# EAGLE board RollerShutterNode (EAGLE 6.5.0)
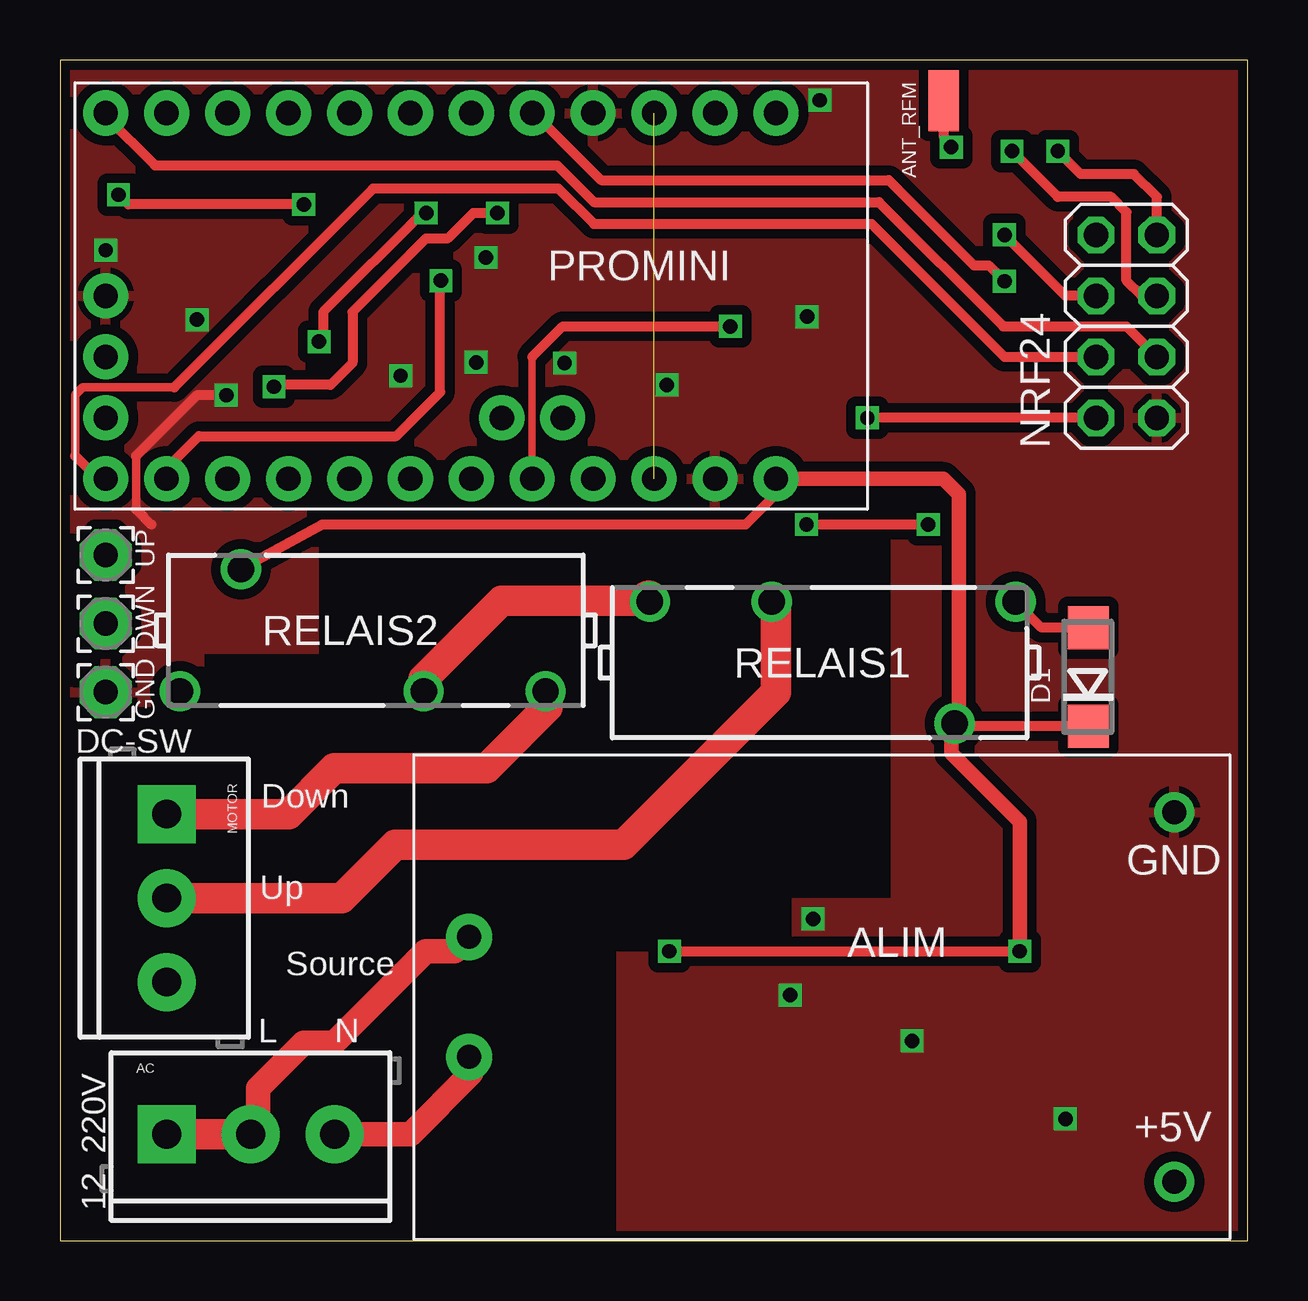
[diagram p0: board, top side]
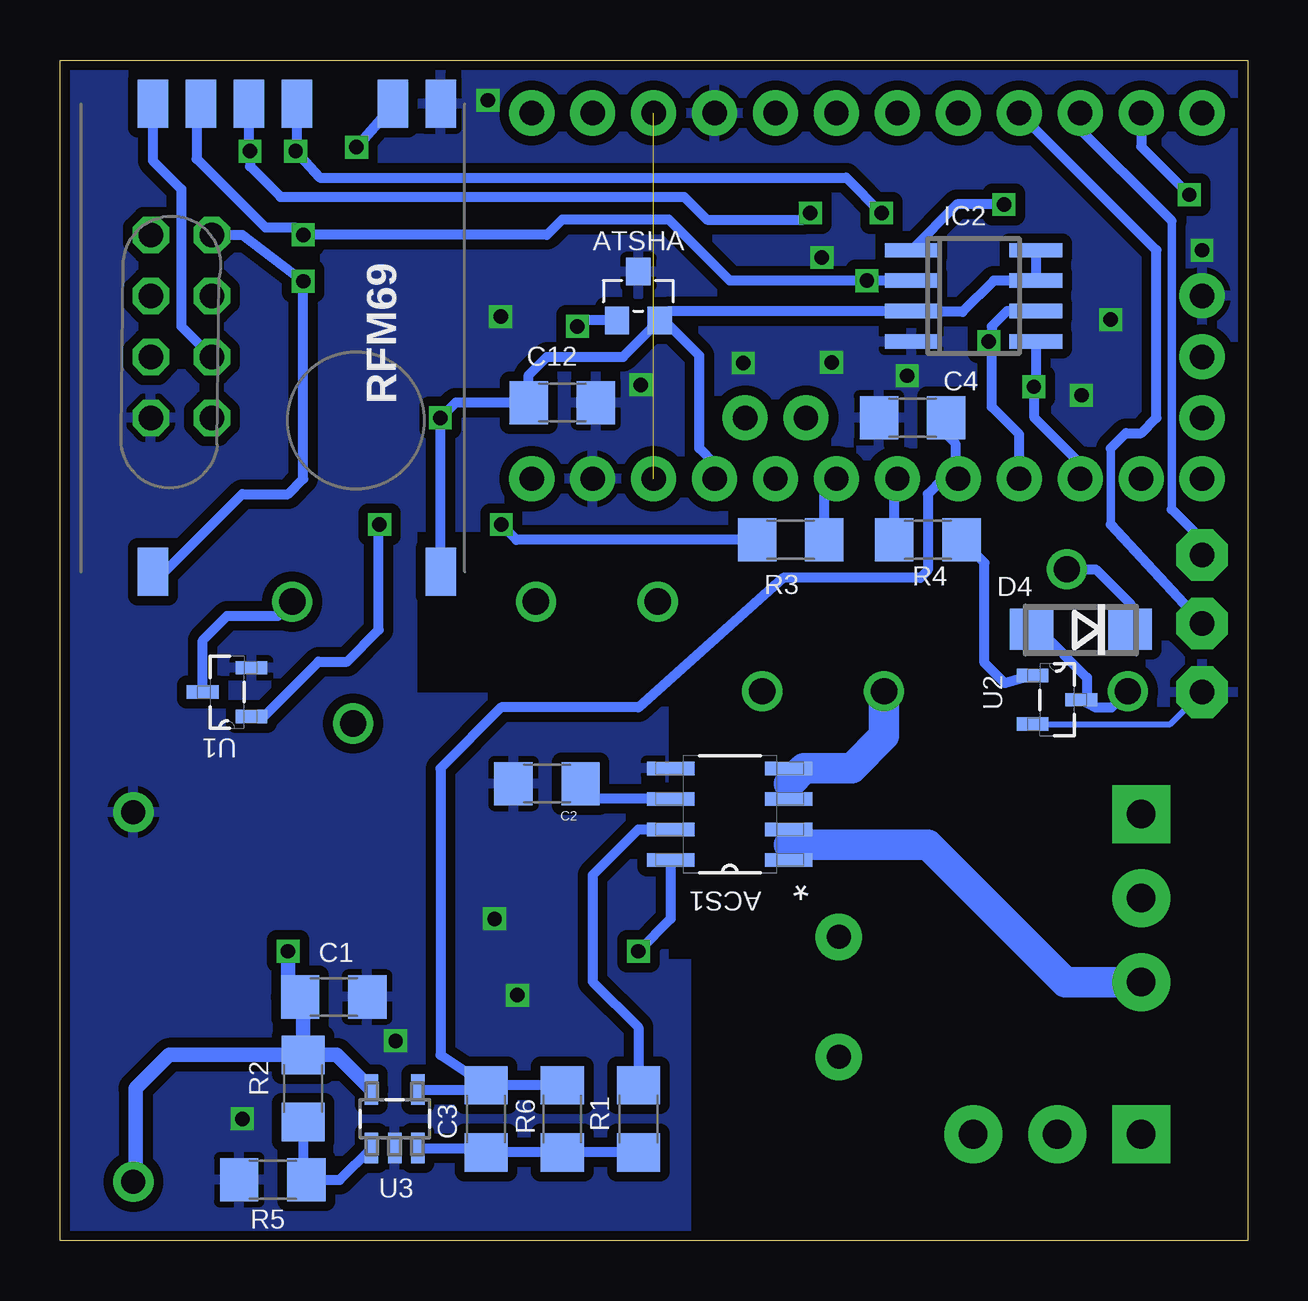
[diagram p1: board, bottom side, seen from below]

Size 49.51 x 49.2 mm. Coordinates in mm from the lower left corner, seen from the top.
Outline: 0,0 49.51,0 49.51,49.2 0,49.2 0,0
Copper layers (1*16): Top 0.0356mm / dielectric 1.5011mm / Bottom 0.0356mm
Design rules "LaenPCBOrder": minimum track width 6mil, minimum drill 13mil, track to track 6mil, track to pad 6mil, pad to pad 6mil, via to via 6mil, smd to smd 6mil, copper to edge 15mil, drill to drill 6mil, minimum pad ring 7mil, minimum via ring 7mil, stop-mask expansion 3mil, vias tented up to drill 0mil, thermal gap 10mil
Net classes: 1 Power: width 0.406 mm

## Footprints (pad centres in the part's own frame; a part is rotated, then mirrored left to right if it is on the bottom)
SCREWTERMINAL-3.5MM-3 = drill 1.2 pad 2.413 square: 1 0,0 | drill 1.2 pad 2.413: 2 3.5,0; 3 7,0
SOIC127P600X175-8N = smd 1.981 x 0.559: 1 -2.464,1.905; 2 -2.464,0.635; 3 -2.464,-0.635; 4 -2.464,-1.905; 5 2.464,-1.905; 6 2.464,-0.635; 7 2.464,0.635; 8 2.464,1.905
HILINK_HLK-PM01 = drill 1 pad 1.93: AC1 2.5,14.7; AC2 -2.5,14.7 | drill 1 pad 1.676: V+ -7.7,-14.7; V- 7.7,-14.7
SMD1,27-2,54 = smd 1.27 x 2.54: 1 0,0
SOT23 = smd 1.016 x 1.143: 1 -0.889,-1.016; 2 0.889,-1.016; 3 0,1.016
1206 = smd 1.6 x 1.8: 1 -1.4,0; 2 1.4,0
DO214AC = smd 1.8 x 1.7: A 2.05,0; C -2.05,0
2,15/1,0 = drill 1.016 pad 2.159 octagon: 1 0,0
SO-08 = smd 0.6 x 2.2: 1 -1.905,-2.6; 2 -0.635,-2.6; 3 0.635,-2.6; 4 1.905,-2.6; 5 1.905,2.6; 6 0.635,2.6; 7 -0.635,2.6; 8 -1.905,2.6
2X04 = drill 1.016 octagon: 1 -3.81,-1.27; 2 -3.81,1.27; 3 -1.27,-1.27; 4 -1.27,1.27; 5 1.27,-1.27; 6 1.27,1.27; 7 3.81,-1.27; 8 3.81,1.27
ARDUINO_PROMINI2 = drill 1.016 pad 1.88: 2 -7.62,2.54; 3 -7.62,0; 4 -7.62,-2.54; 5 -7.62,-5.08; 6 -7.62,-7.62; 7 -7.62,-10.16; 8 -7.62,-12.7; 9 -7.62,-15.24; 10 7.62,-15.24; 11 7.62,-12.7; 12 7.62,-10.16; 13 7.62,-7.62; A0 7.62,-5.08; A1 7.62,-2.54; A2 7.62,0; A3 7.62,2.54; A4 5.08,1.27; A5 5.08,3.81; A6 2.54,-15.24; A7 5.08,-15.24; GND3 -7.62,5.08; GND4 7.62,10.16; GND5 0,-15.24; RAW 7.62,12.7; RST1 -7.62,7.62; RST2 7.62,7.62; RX2 -7.62,10.16; TX2 -7.62,12.7; VCC2 7.62,5.08
G6D = drill 1.1 pad 1.676: 1 8.08,2.5; 5 -2.08,2.5; 7 -7.16,2.5; 13 5.54,-2.58
RFM69W-MINPADS = smd 2 x 1.27: ANA 8,-5; DIO0 -11.5,5; GND 8,-7; MISO 8,1; MOSI 8,3; NSS 8,5; SCK 8,-1; VDD -11.5,-7
SOT103P240X110-3N = smd 1.321 x 0.559: 1 -1.016,1.016; 2 -1.016,-1.016; 3 1.016,0
SOT95P285X120-5N = smd 1.27 x 0.559: 1 -1.219,0.965; 2 -1.219,0; 3 -1.219,-0.965; 4 1.219,-0.965; 5 1.219,0.965

## Placement (x,y rotation side)
AC  [SCREWTERMINAL-3.5MM-3]  4.45,4.45 0 top
ACS1  ACS712_5A  [SOIC127P600X175-8N]  21.59,17.78 180 bottom
ALIM  HILINK_HLK-PM01  [HILINK_HLK-PM01]  31.75,10.16 90 top
ANT_RFM  [SMD1,27-2,54]  36.83,47.51 0 top
ATSHA  ATSHA204A  [SOT23]  25.4,39.37 0 bottom
C1  0.1uf  [1206]  38.1,10.16 0 bottom
C2  0.01uf  [1206]  29.21,19.05 180 bottom
C3  1000pf  [1206]  31.75,5.08 270 bottom
C4  [1206]  13.97,34.29 0 bottom
C12  4u7  [1206]  28.57,34.92 180 bottom
D1  S1G 400v 1a 9843850  [DO214AC]  42.86,23.5 90 top
D4  S1G 400v 1a 9843850  [DO214AC]  6.96,25.48 180 bottom
DWN  [2,15/1,0]  1.91,25.72 0 top
GND  [2,15/1,0]  1.91,22.86 0 top
IC2  AT25DF512C-SSHN-B  [SO-08]  11.43,39.37 270 bottom
MOTOR  [SCREWTERMINAL-3.5MM-3]  4.45,17.78 270 top
NRF24  [2X04]  44.45,38.1 90 top
PROMINI  ARDUINO_PROMINI2  [ARDUINO_PROMINI2]  17.14,39.37 270 top
R1  1k  [1206]  25.4,5.08 270 bottom
R2  100k  [1206]  39.37,6.35 90 bottom
R3  4k7  [1206]  19.05,29.21 180 bottom
R4  4k7  [1206]  13.34,29.21 0 bottom
R5  100k  [1206]  40.64,2.54 0 bottom
R6  3.3k  [1206]  28.57,5.08 90 bottom
RELAIS1  Relais G6D  [G6D]  31.75,24.13 0 top
RELAIS2  Relais G6D  [G6D]  13.08,25.4 180 top
RFM69  RFM69  [RFM69W-MINPADS]  40.64,39.37 90 bottom
U1  MMBT2222A-7-F  [SOT103P240X110-3N]  42.55,22.86 180 bottom
U2  MMBT2222A-7-F  [SOT103P240X110-3N]  7.95,22.54 0 bottom
U3  LM321  [SOT95P285X120-5N]  35.56,5.08 90 bottom
UP  [2,15/1,0]  1.91,28.57 0 top

## Library data of the parts
AC MOTOR = SparkFun-Connectors
ACS1 = pmo_lib; MPN: ACS712ELCTR-20A-T; OC_FARNELL: 1329624; OC_NEWARK: 31M3133; PACKAGE: SOIC-8; SUPPLIER: Allegro
ALIM PROMINI = pmo_lib
ANT_RFM DWN GND UP = wirepad
ATSHA = Sensor_tbowmo
C1-C4 = SparkFun-Passives
C12 = SparkFun-Capacitors
D1 D4 = diode
IC2 = microchip; MF: MICROCHIP; MPN: 25AA080/SN; OC_FARNELL: 1816072; OC_NEWARK: 92C7351
NRF24 = pinhead
R1-R6 = SparkFun-Resistors
RELAIS1 RELAIS2 = relay
RFM69 = LowPowerLab
U1 U2 = pmo_lib; MPN: MMBT2222A-7-F; OC_FARNELL: 1773626; OC_NEWARK: 51R6809; PACKAGE: SOT-23-3; SUPPLIER: DIODES INC.
U3 = pmo_lib; MPN: LM321MF; OC_FARNELL: 9779116; OC_NEWARK: 37K8530; PACKAGE: SOT-23-5; SUPPLIER: National Semiconductors

## Nets
12_220: ACS1.1 ACS1.2 MOTOR.3
A0: C3.1 C4.2 PROMINI.A0 R6.2 U3.4
A3: ATSHA.1 PROMINI.A3
BT_DOWN: DWN.1 PROMINI.6
BT_UP: PROMINI.7 UP.1
COM: ACS1.3 ACS1.4 RELAIS1.7 RELAIS2.5
D2: NRF24.8 PROMINI.2 RFM69.DIO0
D3: PROMINI.3
D9: NRF24.3 PROMINI.9
FLASH_CSN: IC2.1 PROMINI.8
GND: ACS1.5 ALIM.V- ATSHA.3 C1.2 C2.2 C4.1 C12.1 GND.1 IC2.4 NRF24.1 PROMINI.GND3 PROMINI.GND4 PROMINI.GND5 R5.1 RFM69.GND U1.2 U2.2 U3.2
MISO: IC2.5 NRF24.7 PROMINI.12 RFM69.MISO
MOSI: IC2.2 NRF24.6 PROMINI.11 RFM69.MOSI
N$1: ACS1.6 C2.1
N$2: ANT_RFM.1 RFM69.ANA
N$3: ACS1.7 R1.1
N$4: R3.2 U1.1
N$5: R4.2 U2.1
N$6: D4.A RELAIS2.1 U2.3
N$7: MOTOR.2 RELAIS1.5
N$8: D1.A RELAIS1.1 U1.3
N$9: MOTOR.1 RELAIS2.7
N$10: C3.2 R1.2 R6.1 U3.3
N$11: R2.1 R5.2 U3.1
NEUTRE: AC.3 ALIM.AC2
PHASE: AC.1 AC.2 ALIM.AC1
REL_DOWN: PROMINI.A1 R4.1
REL_UP: PROMINI.A2 R3.1
RF_CSN: NRF24.4 PROMINI.10 RFM69.NSS
RST: PROMINI.RST1 PROMINI.RST2
RX: PROMINI.RX2
SCK: IC2.6 NRF24.5 PROMINI.13 RFM69.SCK
TX: PROMINI.TX2
VCC: ATSHA.2 C12.2 IC2.3 IC2.7 IC2.8 NRF24.2 PROMINI.VCC2 RFM69.VDD
VCC5: ACS1.8 ALIM.V+ C1.1 D1.C D4.C PROMINI.RAW R2.2 RELAIS1.13 RELAIS2.13 U3.5

## Tracks (layer width: path | path; a pad name or v marks a point on that pad's centre or on a via)
12_220
  Bottom 0.254: ACS1.1 19.13,16.51 ACS1.2
  Bottom 1.27: 19.13,16.51 13.34,16.51 7.61,10.78 MOTOR.3
A0
  Bottom 0.406: U3.4 32.57,6.3 C3.1 | R6.2 C3.1 | C3.1 33.66,7.75 33.66,19.68 31.11,22.23 25.4,22.23 19.37,27.62 13.65,27.62 13.34,27.94 13.34,31.11 12.7,31.75 PROMINI.A0 12.19,31.88 12.19,33.22 12.57,33.6 C4.2
A3  (via drill 0.6)
  Top 0.305: PROMINI.A3 19.68,36.83
  Top 0.406: 19.68,36.83 20.95,38.1 v27.94,38.1
  Bottom 0.406: ATSHA.1 27.69,38.35 v27.94,38.1
BT_DOWN
  Bottom 0.356: 5.71,29.84 5.71,33.02
  Bottom 0.406: 5.71,33.02 5.08,33.66 4.45,33.66 3.81,34.29 3.81,41.27 PROMINI.6 | DWN.1 5.71,29.84
BT_UP
  Bottom 0.356: 3.17,30.48 3.17,42.49
  Bottom 0.406: 3.17,30.48 1.91,29.21 UP.1 | 3.17,42.49 7.32,46.63 7.32,46.66 PROMINI.7
COM
  Top 1.27: RELAIS2.5 15.16,23.42 18.41,26.67 24.55,26.67
  Top 1.676: 24.55,26.67 RELAIS1.7
  Bottom 0.254: ACS1.3 19.13,19.05 ACS1.4
  Bottom 1.27: RELAIS2.5 15.16,21.03 16.51,19.68 18.49,19.68 19.13,19.05
D2  (via drill 0.6)
  Top 0.406: PROMINI.2 19.76,46.99 22.55,44.2 34.54,44.2 38.1,40.64 38.71,40.64 v39.37,39.98
  Bottom 0.406: NRF24.8 41.91,41.91 v39.37,39.98 39.37,31.75 40.01,31.11 41.91,31.11 45.16,27.87 RFM69.DIO0
D9
  Top 0.406: PROMINI.9 1.91,46.86 3.96,44.81 20.73,44.81 22.25,43.28 34.14,43.28 39.32,38.1 44.45,38.1 NRF24.3
FLASH_CSN  (via drill 0.6)
  Top 0.406: v10.16,43.18 2.85,43.18 v2.44,43.59
  Bottom 0.406: PROMINI.8 4.45,45.59 v2.44,43.59 | v10.16,43.18 12.12,43.18 IC2.1
GND  (via drill 0.6)
  Top 0.356: 3.17,32.7 3.17,30.48
  Top 0.406: v6.93,35.23 5.7,35.23 3.17,32.7 | 3.17,30.48 3.81,29.84
  Bottom 0.254: U2.2 3.24,21.53 GND.1
  other vias: 41.91,5.08 1.91,41.27 17.75,40.97 31.67,47.52 21.03,36.58 25.3,35.66 31.14,38.51 31.39,13.41 17.35,36.6 14.2,36.04 5.71,38.38 35.52,8.33 30.44,10.24
  pour Top (isolate 0.406, rank 6): -5.08,53.34 54.61,53.34 54.61,-5.08 -5.08,-5.08
  pour Bottom (isolate 0.406, rank 6): -2.54,50.8 52.07,50.8 52.07,-2.54 -2.54,-2.54
MISO  (via drill 0.6)
  Top 0.406: v18.24,42.82 17.22,42.82 16.15,41.76 15.24,41.76 12.19,38.71 12.19,36.58 11.28,35.66 8.99,35.66 v8.91,35.59 | NRF24.7 45.72,43.5 44.77,44.45 42.55,44.45 v41.59,45.4
  Bottom 0.406: 18.39,42.67 v18.24,42.82 18.52,42.55 22.54,42.55 23.5,43.5 40.32,43.5 41.59,44.77 v41.59,45.4 41.64,45.45 RFM69.MISO | IC2.5 8.83,35.67 v8.91,35.59 8.89,35.56 8.89,34.29 6.99,32.38 PROMINI.12
MOSI  (via drill 0.6)
  Top 0.406: NRF24.6 41.91,39.37 v39.37,41.91 | PROMINI.11 4.45,32.18 5.79,33.53 14.02,33.53 15.85,35.36 15.85,39.98 v15.88,40.01
  Bottom 0.406: IC2.2 v15.88,40.01 21.59,40.01 24.13,42.55 28.57,42.55 29.21,41.91 v39.37,41.91 39.69,42.23 40.96,42.23 43.81,45.09 43.81,47.2 RFM69.MOSI
N$1
  Bottom 0.406: ACS1.6 27.18,18.41 C2.1
N$2  (via drill 0.6)
  Top 0.406: ANT_RFM.1 36.83,46.04 v37.15,45.57
  Bottom 0.406: RFM69.ANA 35.64,46.91 35.96,46.91 v37.15,45.57
N$3
  Bottom 0.406: ACS1.7 25.4,17.14 27.3,15.24 27.3,10.79 25.4,8.89 R1.1
N$4  (via drill 0.6)
  Top 0.406: v36.2,29.84 v31.11,29.84
  Bottom 0.406: R3.2 30.48,29.21 v31.11,29.84 | v36.2,29.84 36.22,29.82 36.22,25.45 37.54,24.13 38.73,24.13 41.02,21.84 U1.1
N$5
  Bottom 0.406: 12.06,29.08 R4.2 10.97,28.25 10.97,24.08 10.13,23.24 U2.1
N$6
  Bottom 0.406: U2.3 6.35,22.23 | 6.35,22.23 5.68,22.23 RELAIS2.1 | D4.A 8.71,25.48 6.71,23.47 6.71,22.58 6.35,22.23
N$7
  Top 1.27: RELAIS1.5 29.84,26.45 29.84,22.86 23.5,16.51 13.97,16.51 11.74,14.28 MOTOR.2
N$8
  Top 0.406: D1.A 40.91,25.55 RELAIS1.1
  Bottom 0.406: U1.3 43.56,25.02 42.55,26.04 40.42,26.04 RELAIS1.1
N$9
  Top 1.27: RELAIS2.7 20.32,22.82 20.32,22.23 17.78,19.68 11.43,19.68 9.53,17.78 MOTOR.1
N$10
  Bottom 0.406: U3.3 32.57,3.86 C3.2 R6.1 R1.2
N$11
  Bottom 0.406: 39.37,5.08 R2.1 39.37,2.67 R5.2 37.85,2.54 U3.1
N$12
  cutout Top: -1.27,22.23 6.03,22.23 6.03,24.45 10.79,24.45 10.79,29.53 34.61,29.53 34.61,14.29 30.48,14.29 30.48,12.06 23.18,12.06 23.18,-1.27 -1.27,-1.27
N$13
  cutout Bottom: -2.54,22.23 23.18,22.23 23.18,-2.54 -2.54,-2.54
N$14
  cutout Bottom: 10.79,29.53 34.61,29.53 34.61,22.86 10.79,22.86
N$15
  cutout Bottom: 20.95,22.86 20.95,11.75 24.13,11.75 24.13,22.86
NEUTRE
  Top 1.016: AC.3 14.61,4.45 17.14,6.99 17.14,7.57 ALIM.AC2
PHASE
  Top 1.016: ALIM.AC1 16.45,12.06 15.24,12.06 11.43,8.26 10.16,8.26 8.26,6.35 8.26,4.75 AC.2
  Top 1.27: AC.2 AC.1
REL_DOWN
  Bottom 0.406: R4.1 14.73,31.62 PROMINI.A1
REL_UP
  Bottom 0.406: R3.1 17.65,31.25 PROMINI.A2
RF_CSN
  Top 0.356: 0.64,32.7 0.64,35.24 0.95,35.56 4.76,35.56
  Top 0.406: NRF24.4 39.37,36.83 33.83,42.37 22.25,42.37 20.78,43.84 13.04,43.84 4.76,35.56 | PROMINI.10 1.59,31.75 0.64,32.7
  Bottom 0.406: RFM69.NSS 45.64,45.01 44.45,43.81 44.45,38.1 NRF24.4
RST  (1 unrouted)
SCK  (via drill 0.6)
  Top 0.406: NRF24.5 45.09,39.37 44.45,40.01 44.45,42.86 43.81,43.5 41.59,43.5 v39.69,45.4 | v15.27,42.82 15.09,42.82 10.97,38.71 10.97,37.64 v10.79,37.47
  Bottom 0.406: PROMINI.13 9.53,33.6 10.67,34.75 10.67,37.34 v10.79,37.47 10.67,37.59 10.67,38.1 10.03,38.73 IC2.6 | RFM69.SCK 39.64,45.45 v39.69,45.4 38.68,44.3 16.74,44.3 v15.27,42.82 15.52,42.82
VCC  (via drill 0.6)
  Top 0.406: NRF24.2 v33.66,34.29
  Bottom 0.406: PROMINI.VCC2 22.23,32.38 22.86,33.02 22.86,36.88 24.08,38.1 24.26,38.1 ATSHA.2 | 33.66,27.89 RFM69.VDD 33.64,34.27 v33.66,34.29 33.02,34.92 C12.2 29.98,36.06 29.21,36.83 26.04,36.83 ATSHA.2 | ATSHA.2 24.13,38.73 IC2.3 14.01,38.71 11.89,38.71 10.59,40.01 IC2.7 IC2.8
VCC5  (via drill 0.6)
  Top 0.406: PROMINI.RAW 29.84,31.11 28.57,29.84 10.93,29.84 RELAIS2.13 | v25.4,12.06 v40.01,12.06 | 37.15,21.41 RELAIS1.13 | D1.C 37.4,21.45 RELAIS1.13 | 37.47,21.73 RELAIS1.13
  Top 0.61: 37.47,21.73 37.47,31.11 36.83,31.75 PROMINI.RAW | v40.01,12.06 40.01,17.46 37.15,20.32 37.15,21.41
  Bottom 0.406: 39.37,10.03 C1.1 40.01,10.16 | 46.35,2.56 ALIM.V+ | ACS1.8 24.05,13.41 v25.4,12.06 | RELAIS2.13 6.34,27.98 4.88,26.52 4.88,25.51 D4.C
  Bottom 0.61: R2.2 37.98,7.75 U3.5 | R2.2 39.37,10.03 | v40.01,12.06 40.01,10.16 | R2.2 44.95,7.75 46.35,6.35 46.35,2.56

## Text on the board
tPlace: DC-SW | Down | Up | GND | Source | L | N | +5V | 12_220V